# Altium PCB PCB.PcbDoc (part 2 of 3)
Units mm, origin at the board's own origin, x right, y up, seen from the top; angles counter-clockwise.
Board outline 140.5 x 50 mm, 2 copper layers (Top Layer, Bottom Layer), stack 1.69 mm thick; 213 components, 150 nets, 1171 pads, 592 vias.
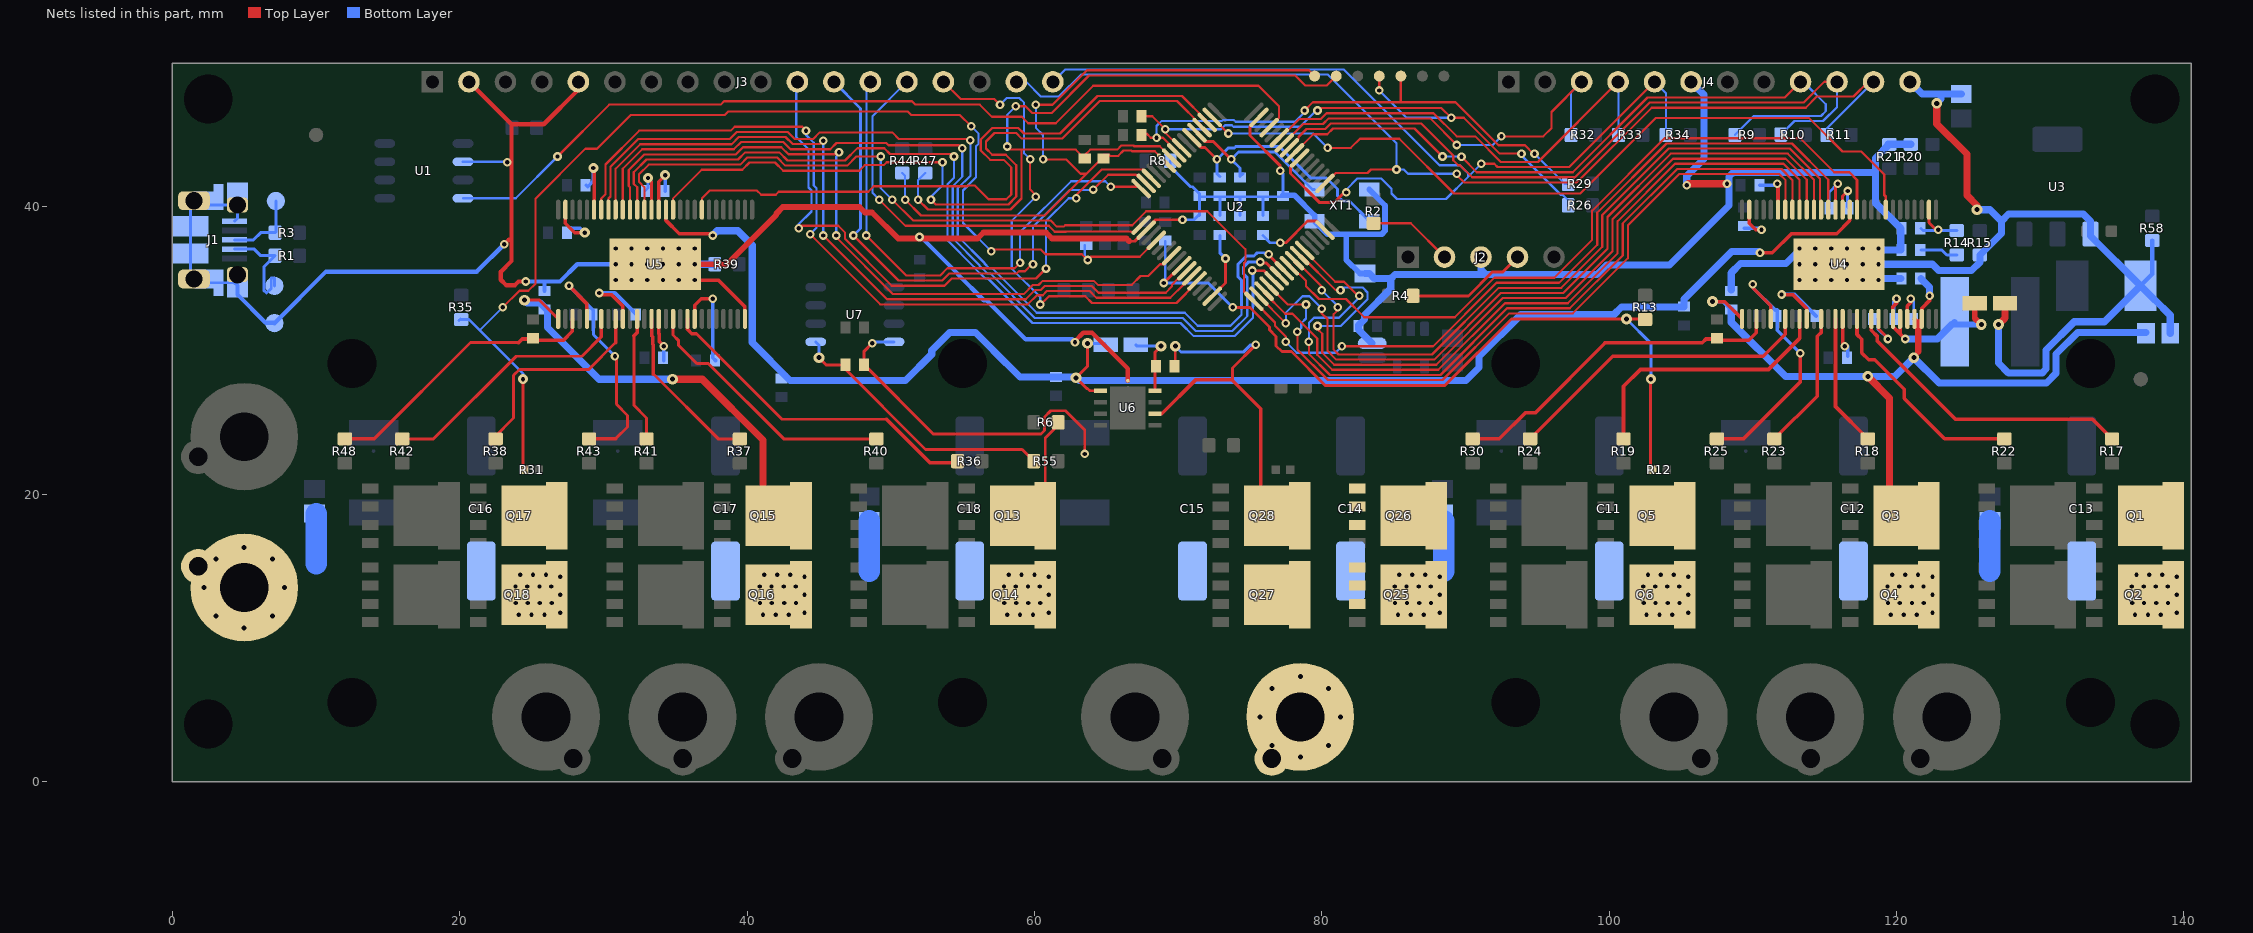
[diagram p2: the nets of this part, all layers, seen from the top]

## Via types
v1: diameter 0.6, hole 0.3, Top Layer to Bottom Layer, tented both sides, 192 vias
v2: diameter 0.7, hole 0.3, Top Layer to Bottom Layer, 154 vias
v3: diameter 0.8, hole 0.3, Top Layer to Bottom Layer, 119 vias
v4: diameter 0.7, hole 0.35, Top Layer to Bottom Layer, 80 vias
v5: diameter 0.75, hole 0.35, Top Layer to Bottom Layer, tented both sides, 37 vias
v6: diameter 0.7, hole 0.3, Top Layer to Bottom Layer, tented both sides, 9 vias
v7: diameter 0.7, hole 0.35, Top Layer to Bottom Layer, tented both sides, 1 vias

## Nets (pads, with @x,y where several pads share a name; then routed paths per layer and width w, separated by ;. In a path a pad name is that pad's centre, name@x,y a point inside that pad or via, vN(x,y) a via of type N, cw(c..) or ccw(c..) an arc to the next point about the centre after c; other vN are vias at no path point) (continued)
CAN_R_1: U1.4 U2.61 | length 63.7
  Top Layer w0.152: v1(26.8,43.5) 30.411,47.111 38.16,47.111 38.395,47.345 51.482,47.345 51.716,47.111 56.189,47.111 57.035,46.265 59.11,46.265 59.566,45.81 61.48,45.81 64.096,48.426 75.593,48.426 77.021,46.998 77.021,46.26 77.026,46.255 77.026,46.208 U2.61@76.333,45.515
  Bottom Layer w0.152: U1.4@20.225,40.595 23.895,40.595 v1(26.8,43.5)
DCBUS: C11.1 C12.1 C13.1 C14.1 C15.1 C16.1 C17.1 C18.1 C25.1 C26.2 C40.2 C41.1 C44.2 C55.2 C56.1 C60.2 J7.1 J9.2 Q1.D Q2.D Q3.D Q4.D Q5.D Q6.D Q13.D Q14.D Q15.D Q16.D Q17.D Q18.D Q25.D Q26.D R6.2 U4.29 U4.53 U4.54 U5.29 | length 107.8
  Top Layer w0.203: v5(24.5,33.5) 25.55,33.5 U5.29@26.85,32.2 ; Q13.D@60.75,18.5 60.75,23.911 61.65,24.811 R6.2@61.65,25
  Top Layer w0.25: v5(107.2,33.4) 108.05,33.4 U4.29@109.25,32.2 ; v5(121.2,29.5) v5@121.25,29.55 ; U4.53@121.25,32.2 121.4,32.05 121.4,29.7 121.6,29.9 121.6,32.05 U4.54@121.75,32.2 121.772,32.2 121.772,32.948 122.3,33.476
  Top Layer w0.5: v5(34.8,28) 36.875,28 41.1,23.775 Q15.D@41.1,18.5 ; v5(118,28.2) 119.5,26.7 Q3.D@119.5,18.5
  Bottom Layer w0.25: v5(107.2,33.4) 107.9,33.4 C41.1@108.5,32.8
  Bottom Layer w0.5: v5(24.5,33.5) 24.703,33.297 25.603,33.297 26.1,32.8 26.1,31.6 29.7,28 v5(34.8,28) ; C41.1@108.5,32.8 108.5,31.964 112.264,28.2 v5(118,28.2) 119.9,28.2 v5(121.2,29.5) 122.966,27.734 130.429,27.734 131.106,28.411 131.106,29.751 132.608,31.253 C60.2@137.35,31.253 ; C25.1@121.7,35 122.3,34.4 v1(122.3,33.8)
  Bottom Layer w1.5: 10,15.15 C55.2@10,18.65 ; 48.5,14.65 C44.2@48.5,18.15 ; 88.5,14.65 C26.2@88.5,18.15 ; 126.5,14.65 C40.2@126.5,18.15
  other v3: 24.1,11.6 25,11.6 25.9,11.6 41.1,11.6 42,11.6 42.9,11.6 58.1,11.6 59,11.6 59.9,11.6 85.3,11.6 86.2,11.6 87.1,11.6 102.6,11.6 103.5,11.6 104.4,11.6 119.6,11.6 120.5,11.6 121.4,11.6 136.6,11.6 137.5,11.6 138.4,11.6 27,11.75 44,11.75 61,11.75 88.2,11.75 105.5,11.75 122.5,11.75 139.5,11.75 23.9,12.425 24.725,12.425 25.575,12.425 26.4,12.425 40.9,12.425 41.725,12.425 42.575,12.425 43.4,12.425 57.9,12.425 58.725,12.425 59.575,12.425 60.4,12.425 85.1,12.425 85.925,12.425 86.775,12.425 87.6,12.425 102.4,12.425 103.225,12.425 104.075,12.425 104.9,12.425 119.4,12.425 120.225,12.425 121.075,12.425 121.9,12.425 136.4,12.425 137.225,12.425 138.075,12.425 138.9,12.425 27,13 44,13 61,13 88.2,13 105.5,13 122.5,13 139.5,13 23.875,13.575 24.7,13.575 25.55,13.575 26.375,13.575 40.875,13.575 41.7,13.575 42.55,13.575 43.375,13.575 57.875,13.575 58.7,13.575 59.55,13.575 60.375,13.575 85.075,13.575 85.9,13.575 86.75,13.575 87.575,13.575 102.375,13.575 103.2,13.575 104.05,13.575 104.875,13.575 119.375,13.575 120.2,13.575 121.05,13.575 121.875,13.575 136.375,13.575 137.2,13.575 138.05,13.575 138.875,13.575 27,14.25 44,14.25 61,14.25 88.2,14.25 105.5,14.25 122.5,14.25 139.5,14.25 24.2,14.4 25.1,14.4 26,14.4 41.2,14.4 42.1,14.4 43,14.4 58.2,14.4 59.1,14.4 60,14.4 85.4,14.4 86.3,14.4 87.2,14.4 102.7,14.4 103.6,14.4 104.5,14.4 119.7,14.4 120.6,14.4 121.5,14.4 136.7,14.4 137.6,14.4 138.5,14.4
  other v4: 5,10.7 3.02,11.52 6.98,11.52 2.2,13.5 7.8,13.5 3.02,15.48 6.98,15.48 5,16.3
EN_GATE_1: U2.33 U4.16 U5.16 | length 106.9
  Top Layer w0.152: U5.16@32.85,39.8 32.85,41.36 32.471,41.739 32.471,42.261 33.145,42.935 39.513,42.935 40.013,43.435 42.09,43.435 42.659,42.865 46.965,42.865 47.6,43.5 v1(49.3,43.5) ; v1(50.1,40.5) 51.559,39.041 61.14,39.041 61.56,38.621 62.04,38.621 62.14,38.721 66.81,38.721 67.776,39.687 72.032,39.687 74.679,37.04 74.679,36.179 74.585,36.085 74.585,34.111 U2.33@75.273,33.424 75.276,33.424 76.746,31.954 76.746,31.729 77.5,30.975 v1(77.5,30.6) ; v1(81.4,30.3) 87.746,30.3 92.159,34.713 96.516,34.713 99.168,37.365 99.168,39.583 103.996,44.412 112.723,44.412 115.25,41.885 U4.16@115.25,39.8
  Bottom Layer w0.152: v1(49.3,43.5) 49.3,41.3 v1(50.1,40.5) ; v1(77.5,30.6) 78.254,29.846 80.946,29.846 v1(81.4,30.3)
GH_A_2: R17.2 U4.47 | length 20.9
  Top Layer w0.25: U4.47@118.25,32.2 118.25,31.4 118.672,30.978 118.672,30.64 124.098,25.214 133.636,25.214 R17.2@135,23.85
GH_A_3: R36.1 U5.47 | length 23.6
  Top Layer w0.203: 36.464,31.172 42.422,25.214 49.704,25.214
  Top Layer w0.25: U5.47@35.85,32.2 35.85,31.474 36.152,31.172 36.464,31.172 ; 49.704,25.214 52.743,22.175 R36.1@54.825,22.175
GH_B_2: R18.2 U4.42 | length 9.3
  Top Layer w0.25: U4.42@115.75,32.2 115.75,26.1 R18.2@118,23.85
GH_B_3: R37.1 U5.42 | length 11.8
  Top Layer w0.203: 33.478,28.361 37.989,23.85 R37.1@39.5,23.85
  Top Layer w0.25: U5.42@33.35,32.2 33.35,31.038 33.428,30.96 33.428,30.44 33.424,30.436 33.478,30.381 33.478,28.361
GH_C_2: R19.2 U4.37 | length 18.6
  Top Layer w0.25: R19.2@101,23.85 101,27.5 102.178,28.678 111.089,28.678 113.25,30.839 U4.37@113.25,32.2
GH_C_3: R38.1 U5.37 | length 14.7
  Top Layer w0.203: R38.1@22.5,23.85 22.4,23.95 23.745,25.295 23.745,28.271 24.152,28.678 28.978,28.678 30.85,30.55
  Top Layer w0.25: 30.85,30.55 U5.37@30.85,32.2
GL_A_2: R22.2 U4.45 | length 15.3
  Top Layer w0.25: U4.45@117.25,32.2 117.25,31.118 117.581,30.787 117.581,29.831 118.056,29.356 118.479,29.356 120.531,27.304 120.531,26.663 123.344,23.85 R22.2@127.5,23.85
GL_A_3: R40.1 U5.45 | length 18.5
  Top Layer w0.203: U5.45@34.85,32.2 34.85,31.08 35.211,30.719 35.211,30.389 36.5,29.1 37.3,29.1 42.55,23.85 R40.1@49,23.85
GL_B_2: R23.2 U4.40 | length 9.7
  Top Layer w0.25: R23.2@111.5,23.85 114.472,26.822 114.472,30.972 114.522,31.022 114.75,31.25 U4.40@114.75,32.2
GL_B_3: R41.1 U5.40 | length 8.8
  Top Layer w0.203: 32.122,31.022 32.122,26.188 33,25.31 R41.1@33,23.85
  Top Layer w0.25: 32.122,31.022 32.35,31.25 U5.40@32.35,32.2
GL_C_2: R24.2 U4.35 | length 21.8
  Top Layer w0.25: R24.2@94.5,23.85 100.25,29.6 110.73,29.6 112.25,31.12 U4.35@112.25,32.2
GL_C_3: R42.1 U5.35 | length 18
  Top Layer w0.203: R42.1@16,23.85 18.175,23.85 23.925,29.6 28.5,29.6 29.85,30.95
  Top Layer w0.25: 29.85,30.95 U5.35@29.85,32.2
GND: C2.2 C3.2 C4.1 C5.1 C6.1 C7.2 C8.2 C9.2 C10.2 C19.1 C20.1 C24.2 C25.2 C27.2 C29.2 C41.2 C56.2 C60.1 C65.1 D1.A J1.5 J1.SH J2.3 J3.2 J3.5 J4.6 J4.12 NT1.1 NT7.1 R8.1 R15.2 R20.2 R21.2 R39.2 R58.2 TP3.1 U1.2 U2.18 U2.63 U3.1 U4.57 U5.55 U5.57 XT1.G | length 324.7
  Top Layer w0.203: 66.6,37.6 66.986,37.6 67.76,38.374 U2.18@67.777,38.374 ; U2.18@67.825,38.485 68.44,39.1 v1(70.3,39.1) ; U2.63@75.626,46.223 74.995,45.591 74.995,44.96 77.1,42.855 v1(77.1,42.5) ; v1@105.453,41.553 v1@105.5,41.6
  Top Layer w0.25: v2(36.35,36) v2(36.35,34.9) 38,34.9 39.85,33.05 U5.55@39.85,32.2
  Top Layer w0.3: J3.2@20.64,48.7 23.6,45.74 ; v1(23.1,37.4) 23.4,37.7 23.6,37.7 ; v1(24.6,34.8) 24.094,34.8 23.841,34.547 23.23,34.547 22.847,34.93 22.847,35.47 23.6,36.223 23.6,37.7 ; J3.5@28.26,48.7 28.26,48.16 25.84,45.74 23.6,45.74 ; v1@52,37.786 v1(52,37.9) ; v1(62.822,30.578) 62.822,30.651 63.398,31.228 64.002,31.228 66.5,28.73 NT7.1@66.5,27.9 ; 23.6,37.7 23.6,45.74
  Top Layer w0.4: v2(30.85,36) v2(31.95,36) v2(33.05,36) U5.57@33.6,36 v2(34.15,36) v2(35.25,36) v2(36.35,36) 38.6,36 42.022,39.422 42.022,39.522 42.478,39.978 47.822,39.978 48.2,39.6 48.7,39.6 50.514,37.786 52,37.786 56.039,37.786 56.459,38.206 60.795,38.206 61.214,37.786 62.386,37.786 62.399,37.8 66.4,37.8 66.6,37.6
  Top Layer w0.5: v1(105.4,41.5) v1@105.453,41.553 ; v1@105.5,41.6 v1(108.2,41.6) ; v5(122.8,47.2) 122.8,45.771 124.9,43.671 124.9,40.8 125.6,40.1 v5(125.6,39.8) ; v5(127.1,31.8) 127.55,32.25 D1.A@127.55,33.3
  Bottom Layer w0.203: J1.5@4.325,39 4.525,39.2 J1.SH@4.525,40.125 1.8,40.125 J1.SH@1.5,40.425 1.25,40.175 J1.SH@1.25,38.65 J1.SH@1.25,36.75 1.25,35.225 J1.SH@1.5,34.975 1.762,34.713 J1.SH@3.2,34.713 4.312,34.713 J1.SH@4.525,34.5 ; U1.2@20.225,43.135 23.265,43.135 v1(23.3,43.1) ; R8.1@69.45,43.2 69.45,42.805 70.859,41.396 71.004,41.396 71.5,40.9 C6.1@71.5,40.7 ; v1(70.3,39.1) 71.1,39.1 C8.2@71.5,39.5 ; C8.2@71.5,39.4 C8.2@71.5,39.5 ; C5.1@72.9,39.4 C2.2@72.9,40.7 ; C9.2@74.3,39.4 C3.2@74.3,40.7 ; C4.1@75.9,39.4 C7.2@75.9,40.7 ; v1@77.3,42.3 77.3,40.8 77.2,40.7 C7.2@75.9,40.7 ; C8.2@71.5,39.5 C6.1@71.5,40.7 ; C6.1@71.5,40.7 C2.2@72.9,40.7 ; C2.2@72.9,40.7 C3.2@74.3,40.7 ; C3.2@74.3,40.7 C7.2@75.9,40.7
  Bottom Layer w0.3: J1.SH@4.525,34.5 4.525,33.89 6.49,31.925 TP3.1@7.1,31.925 ; TP3.1@7.1,31.9 10.688,35.488 21.188,35.488 v1(23.1,37.4) ; v1(24.6,34.8) 25.9,34.8 ; C56.2@25.9,34.15 25.9,34.8 ; v2(30.85,36) 28.176,36 26.977,34.8 25.9,34.8 ; v1(52,37.9) 52.1,37.8 52.2,37.8 54.672,35.328 54.672,35.294 56.466,33.5 56.666,33.5 59.394,30.772 62.628,30.772 v1(62.822,30.578) ; C29.2@136.975,34.5 137.8,35.325 R58.2@137.8,37.65
  Bottom Layer w0.4: C10.2@77.3,40.8 78.1,40.8 79.5,39.4 XT1.G@79.5,39 80.403,38.097 81.7,38.097 ; C20.1@83,35.35 82.65,35.35 81.703,36.297 81.703,38.094 81.7,38.097 ; XT1.G@83.3,41.2 84.403,40.097 84.403,38.333 84.167,38.097 81.7,38.097
  Bottom Layer w0.5: v2(36.35,36) R39.2@37.75,36 ; C20.1@83,35.35 83.315,35.35 83.665,35 84.8,35 ; NT1.1@83.5,30.5 82.55,31.45 C65.1@82.55,31.7 82.55,31.75 82.963,32.163 82.963,32.463 84.8,34.3 84.8,35 ; J2.3@91.08,36.5 91.08,35.62 91.403,35.297 ; v1(105.4,41.5) 105.4,42.148 106.597,43.345 106.597,47.803 J4.6@105.7,48.7 ; v1(108.2,41.6) 108.247,41.6 v1@108.347,41.7 ; C41.2@108.5,34.2 108.5,35.404 109.143,36.047 112.311,36.047 113.364,37.1 v2(115.45,37.1) ; 118.547,42.4 118.544,42.397 108.631,42.397 108.347,42.113 v1@108.347,41.7 ; v2(118.75,34.9) v2(118.75,36) ; v2(118.75,37.1) v2(118.75,36) ; v2@118.85,35 C25.2@120.3,35 ; v2@118.85,37 120.3,37 120.3,38.5 118.547,40.253 118.547,43.397 R21.2@119.5,44.35 ; R21.2@119.415,44.35 R20.2@121,44.35 ; J4.12@120.94,48.7 121.79,47.85 123.1,47.85 ; v5(122.8,47.2) 123.1,47.5 123.1,47.85 ; C19.1@124.5,47.85 123.1,47.85 ; v5(125.6,39.8) 126.5,39.8 127.3,39 ; v5(127.1,31.8) 127.1,29.119 127.782,28.437 130.138,28.437 130.403,28.702 130.403,30.042 132.364,32.003 134.478,32.003 C29.2@136.975,34.5 ; C60.1@139.05,31.2 139.05,32.45 137.95,33.55 137.95,33.525 C29.2@136.975,34.5 ; 84.8,35 85.097,35.297 91.403,35.297 ; 91.403,35.297 99.149,35.297 99.805,35.953 104.206,35.953 108.347,40.094 v1@108.347,41.7 ; v2(118.75,36) 122.506,36 122.943,35.563 125.218,35.563 125.8,36.145 R15.2@125.8,36.65 127.3,38.15 127.3,39 ; 127.3,39 127.8,39.5 133,39.5 133.5,39 U3.1@133.5,38.1 133.5,37.975 C29.2@136.975,34.5
  other v2: 30.85,34.9 31.95,34.9 33.05,34.9 34.15,34.9 35.25,34.9 113.25,34.9 114.35,34.9 115.45,34.9 116.55,34.9 117.65,34.9 113.25,36 114.35,36 115.45,36 116.55,36 117.65,36 30.85,37.1 31.95,37.1 33.05,37.1 34.15,37.1 35.25,37.1 36.35,37.1 113.25,37.1 114.35,37.1 116.55,37.1 117.65,37.1
GPIO_1_1: J3.11 U2.14 | length 43.4
  Top Layer w0.152: v1(43.6,38.5) 43.779,38.679 46.34,38.679 46.821,38.198 46.821,37.76 50.071,34.51 53.734,34.51 54.234,35.01 60.11,35.01 v1(60.8,35.7) ; v1(62.9,40.6) 62.9,40.819 64.669,42.588 67.623,42.588 68.031,42.18 68.031,41.98 U2.14@68.131,41.98
  Bottom Layer w0.152: J3.11@43.5,48.7 43.421,48.621 43.421,44.86 44.279,44.002 44.279,41.34 44.479,41.14 44.479,39.679 43.6,38.8 v1(43.6,38.5) ; v1(60.8,35.7) 60.8,39.019 62.381,40.6 v1(62.9,40.6)
GPIO_2_1: J3.12 U2.15 | length 38.4
  Top Layer w0.152: v1(47.4,38) 50.534,34.865 53.587,34.865 54.087,35.365 58.768,35.365 58.923,35.521 59.34,35.521 59.819,36 v1(59.9,36) ; v1(64.1,41.2) 65.132,42.232 67.071,42.232 67.173,42.13 67.173,42.187 67.217,42.23 67.273,42.23 67.777,41.726 U2.15@67.777,41.626
  Bottom Layer w0.152: v1(59.9,36) 59.9,38.621 62.458,41.179 64.079,41.179 v1(64.1,41.2)
  Bottom Layer w0.203: J3.12@46.04,48.7 47.9,46.84 47.9,38.5 v1(47.4,38)
GPIO_3_1: J3.13 U2.16 | length 35.3
  Top Layer w0.152: v1(48.3,38) 51.079,35.221 53.44,35.221 53.94,35.721 58.621,35.721 v1(59,36.1) ; v1(65.3,41.4) 67.297,41.4 U2.16@67.424,41.273
  Bottom Layer w0.152: v1(48.3,38) 48.3,48.42 J3.13@48.58,48.7 ; v1(59,36.1) 59,38.023 59,38.223 62.556,41.779 64.921,41.779 v1(65.3,41.4)
GPIO_4_1: J3.14 U2.17 | length 28.8
  Top Layer w0.152: v1(49.2,40.5) 51.015,38.685 60.993,38.685 61.413,38.265 62.187,38.265 62.201,38.279 66.707,38.279 66.731,38.255 67.051,38.255 67.366,38.569 67.366,38.669 U2.17@67.424,38.727
  Bottom Layer w0.152: v1(49.2,40.5) 48.721,40.979 48.721,46.301 J3.14@51.12,48.7
GPIO_5_1: J3.15 U2.28 | length 34.6
  Top Layer w0.152: J3.15@53.66,48.7 54.86,47.5 57.2,47.5 v1(57.6,47.1) ; v1(59.7,43.3) 59.7,41.2 60.1,40.8 v1(60.1,40.7) ; v1(60.4,33.2) 60.432,33.2 61.011,33.779 63.54,33.779 64.009,33.31 69.885,33.31 71.213,34.638 71.213,34.838 U2.28@71.313,34.838
  Bottom Layer w0.152: v1(57.6,47.1) 58.079,47.579 58.94,47.579 59.279,47.24 59.279,43.721 v1(59.7,43.3) ; v1(60.1,40.7) 58.421,39.021 58.421,35.698 60.4,33.719 v1(60.4,33.2)
GVDD: C32.2 C47.2 C61.2 D2.A U4.13 U5.13 U6.1 | length 107.2
  Top Layer w0.203: v5(63.7,30.5) 63.7,28.9 v5(62.9,28.1) 63.639,27.361 63.7,27.361 63.861,27.2 U6.1@64.605,27.2
  Top Layer w0.25: U5.13@34.35,39.8 34.35,39.05 35.267,38.133 37.467,38.133 v1(37.6,38) ; v1(110.5,36.8) 111.356,36.8 112.689,38.133 115.833,38.133 116.75,39.05 U4.13@116.75,39.8
  Bottom Layer w0.203: v5(63.7,30.5) 64.85,30.5 D2.A@64.95,30.4
  Bottom Layer w0.5: v1(37.6,38) 37.928,38.328 39.343,38.328 40.353,37.318 40.353,30.553 42.995,27.911 51.019,27.911 52.847,29.739 52.847,29.992 54.108,31.253 55.892,31.253 57.153,29.992 57.153,29.982 58.985,28.15 C61.2@61.5,28.15 62.85,28.15 v5(62.9,28.1) 63.089,27.911 90.039,27.911 90.947,28.819 90.947,29.592 93.84,32.485 100.314,32.485 100.857,33.028 105.178,33.028 C32.2@105.2,33.05 105.2,33.565 108.529,36.894 110.406,36.894 v1(110.5,36.8)
M0_AH_1: U2.41 U4.17 | length 52
  Top Layer w0.152: U2.41@78.101,36.252 78.101,36.152 78.277,35.977 78.477,35.977 80,34.454 v1(80,34.2) ; v1(81.1,33) 81.1,32.8 80.821,32.521 80.821,30.06 81.16,29.721 87.669,29.721 92.306,34.358 96.663,34.358 99.523,37.218 99.523,39.436 104.143,44.056 112.576,44.056 114.679,41.953 114.679,39.8 U4.17@114.75,39.8
  Bottom Layer w0.152: v1(80,34.2) 81.1,33.1 v1(81.1,33)
M0_AL_1: U2.34 U4.18 | length 54
  Top Layer w0.152: U2.34@75.626,33.777 77.5,31.904 v1(77.5,31.9) ; v1(80,32.9) 80,32.578 80.39,32.188 80.39,29.988 81.013,29.365 87.817,29.365 92.453,34.002 96.81,34.002 99.878,37.071 99.878,39.289 104.29,43.701 112.429,43.701 114.25,41.88 U4.18@114.25,39.8
  Bottom Layer w0.152: v1(77.5,31.9) 77.5,32.619 78.66,33.779 79.14,33.779 80,32.919 v1(80,32.9)
M0_BH_1: U2.42 U4.19 | length 56.7
  Top Layer w0.152: U2.42@78.455,36.606 78.555,36.606 80.961,34.2 v1(81.3,34.2) ; v1(79.7,31.7) 79.7,31.501 80.034,31.166 80.034,29.841 80.866,29.01 87.964,29.01 92.601,33.647 96.97,33.647 100.234,36.91 100.234,39.142 104.437,43.345 112.282,43.345 113.75,41.877 U4.19@113.75,39.8
  Bottom Layer w0.152: v1(79.7,31.7) 81.318,31.7 83.179,33.56 83.179,34.04 82.84,34.379 81.479,34.379 v1(81.3,34.2)
M0_BL_1: U2.35 U4.20 | length 50
  Top Layer w0.152: U2.35@75.98,34.131 75.98,34.031 77.457,32.554 77.965,32.554 79.679,30.84 79.679,29.694 80.718,28.655 88.111,28.655 92.748,33.291 97.118,33.291 100.589,36.763 100.589,38.994 104.585,42.99 112.134,42.99 113.25,41.874 U4.20@113.25,39.8
M0_CH_1: U2.43 U4.21 | length 55.5
  Top Layer w0.152: U2.43@78.808,36.959 78.808,36.898 80.927,34.779 81.54,34.779 82.519,33.8 v1(82.6,33.8) ; v1(79.1,30.6) 79.1,29.771 80.571,28.299 88.258,28.299 92.895,32.936 97.265,32.936 100.945,36.616 100.945,38.847 104.732,42.635 111.987,42.635 112.75,41.872 U4.21@112.75,39.8
  Bottom Layer w0.152: v1(79.1,30.6) 79.1,31.919 79.46,32.279 81.198,32.279 82.6,33.681 v1(82.6,33.8)
M0_CL_1: U2.36 U4.22 | length 50.8
  Top Layer w0.152: U2.36@76.333,34.485 76.343,34.485 77.628,33.2 v1(78.9,33.2) ; v1(78.3,31.3) 78.3,30.068 80.424,27.944 88.405,27.944 93.042,32.581 97.462,32.581 101.3,36.419 101.3,38.7 104.879,42.279 111.84,42.279 112.279,41.84 112.279,39.829 U4.22@112.25,39.8
  Bottom Layer w0.152: v1(78.3,31.3) 78.565,31.565 78.565,31.887 78.9,32.222 v1(78.9,33.2)
M0_DC_CAL_1: U2.40 U4.12 | length 50.8
  Top Layer w0.152: U2.40@77.748,35.899 77.848,35.899 78.9,34.847 78.9,34.481 79.802,33.579 81.686,33.579 82.946,32.319 89.263,32.319 92.012,35.068 96.184,35.068 98.812,37.697 98.812,39.73 103.849,44.767 113.301,44.767 115.668,42.4 116.726,42.4 117.255,41.871
  Top Layer w0.203: U4.12@117.25,39.8 117.25,40.824 117.255,40.829 117.255,41.871
M0_ENC_A_1: J4.9 R9.1 U2.56 | length 49.7
  Top Layer w0.152: v1(88.4,43.5) 86.455,45.445 80.772,45.445 80.382,45.055 79.408,45.055 U2.56@78.295,43.941 ; v1(89.725,43.475) 90.79,42.41 97.471,42.41 102.671,47.61 112.23,47.61 J4.9@113.32,48.7 ; U2.56@78.295,43.941 78.295,44.005 78.101,43.812 U2.56@78.101,43.748 U2.56@78.295,43.941
  Bottom Layer w0.152: v1(88.4,43.5) 89.7,43.5 v1(89.725,43.475) ; R9.1@108.75,45 110.071,46.321 114.74,46.321 115.079,46.66 115.079,47.14 J4.9@113.668,48.551
M0_ENC_B_1: J4.10 R10.1 U2.57 | length 49.9
  Top Layer w0.152: U2.57@77.748,44.101 78.381,44.734 78.381,44.857 78.934,45.41 80.234,45.41 80.625,45.801 86.918,45.801 89.146,43.573 89.146,43.235 89.485,42.895 89.623,42.895 90.464,42.055 97.618,42.055 102.818,47.255 113.533,47.255 114.978,48.7 J4.10@115.86,48.7
  Bottom Layer w0.152: R10.1@111.95,45.022 112.893,45.965 114.887,45.965 115.86,46.938 J4.10@115.86,48.7
M0_ENC_Z_1: J3.17 J4.11 R11.1 U2.50 | length 78.3
  Top Layer w0.152: U2.50@80.223,41.626 80.236,41.626 80.965,42.355 83.179,42.355 83.424,42.6 v1(85.2,42.6) ; v1(89.4,42.3) 89.4,42.2 89.901,41.699 97.765,41.699 102.965,46.899 113.68,46.899 114.452,47.671 117,47.671 118.029,48.7 J4.11@118.4,48.7
  Bottom Layer w0.152: J3.17@58.74,48.7 59.419,48.7 60.448,47.671 61.706,47.671 63.234,49.199 79.244,49.199 80.426,49.199 85.2,44.425 v1(85.2,42.6) 85.7,42.6 86,42.3 v1(89.4,42.3) ; R11.1@115.15,45 115.15,45.45 J4.11@118.4,48.7
M0_NCS_1: U2.2 U4.8 | length 55.8
  Top Layer w0.152: U2.2@72.374,46.223 73.496,45.1 v1(73.5,45.1) ; v1(80.4,44.1) 82.019,44.1 82.654,44.735 85.392,44.735 89.203,40.924 97.995,40.924 103.26,46.189 113.89,46.189 116.234,43.845 117.543,43.845 119.145,42.242 119.145,41.371
  Top Layer w0.203: 119.145,41.371 119.145,40.829 119.25,40.724 U4.8@119.25,39.8
  Bottom Layer w0.152: v1(73.5,45.1) 79.4,45.1 v1(80.4,44.1)
M0_SO1_1: C38.1 R26.2 TP6.1 U2.8 | length 42.4
  Top Layer w0.152: C38.1@67.5,46.3 68.2,46.3 v1(69.1,45.4) 69.1,45.154 70.152,44.101 U2.8@70.252,44.101 ; v1(79.7,46.7) 79.867,46.867 88.333,46.867 v1(89,46.2) 89.878,46.2 92.378,43.7 v1(93.9,43.7) ; v1(84,48.1) TP6.1@84,49.1
  Bottom Layer w0.152: v1(69.1,45.4) 72.981,45.4 73.26,45.679 73.74,45.679 73.853,45.566 78.485,45.566 79.619,46.7 v1(79.7,46.7) ; v1(84,48.1) 85.9,46.2 v1(89,46.2) ; v1(93.9,43.7) 93.9,43.571 96.65,40.821 96.779,40.821 97.15,40.45 R26.2@97.15,40.1
M0_SO2_1: C39.1 R29.2 TP7.1 U2.9 | length 37.9
  Top Layer w0.152: C39.1@67.3,45 67.5,44.8 67.8,45.1 68.1,44.8 v1(68.5,44.8) 68.947,44.8 69.899,43.848 U2.9@69.899,43.748 ; v1(78.8,46.7) 79.379,47.279 85.5,47.279 ; TP7.1@85.5,49.1 85.5,47.279 ; v1(94.8,43.7) 94.719,43.7 94.14,44.279 92.301,44.279 89.301,47.279 85.5,47.279
  Bottom Layer w0.152: v1(68.5,44.8) 68.5,45.619 68.86,45.979 73.058,45.979 73.113,46.034 73.887,46.034 74,45.921 78.14,45.921 78.8,46.581 v1(78.8,46.7) ; v1(94.8,43.7) 96.9,41.6 R29.2@97.15,41.6
M0_TEMP_1: C23.2 R12.1 R13.1 U2.25 | length 54.5
  Top Layer w0.203: v1(69,34.7) 70.199,35.899 U2.25@70.252,35.899 ; v1(73.8,33) 75.004,33 76.365,31.638 76.365,31.438 76.821,30.983 76.821,30.881 76.82,30.319 77.219,29.92 77.883,29.92 80.24,27.563 88.563,27.563 93.2,32.2 v5(101.2,32.2) 102.45,32.2 R13.1@102.5,32.15 ; R12.1@102.875,22 102.875,27.975 v6(102.9,28)
  Bottom Layer w0.203: C23.2@69.1,37.6 69.1,34.8 v1(69,34.7) 72.1,34.7 v1(73.8,33) ; v5(101.2,32.2) 102.9,30.5 v6(102.9,28)
M1_AH_1: U2.37 U5.17 | length 62.1
  Top Layer w0.152: U5.17@32.35,39.8 32.35,41.357 32.115,41.592 32.115,42.408 32.997,43.29 39.366,43.29 39.866,43.79 42.237,43.79 42.806,43.221 46.818,43.221 47.677,44.079 49.54,44.079 49.94,43.679 54.221,43.679 v1(54.4,43.5)
  Top Layer w0.203: v1(75.164,35.564) 75.179,35.55 75.975,35.55 U2.37@76.687,34.838
  Bottom Layer w0.152: v1(54.4,43.5) 54.4,42.025 53.956,41.581 53.956,37.655 55.811,35.8 55.811,35.766 56.566,35.011 56.766,35.011 59.866,31.911 60.766,31.911 70.166,31.911 71.077,31 73.923,31 75.217,32.294 75.217,33.05
  Bottom Layer w0.203: v1(75.164,35.564) 75.217,35.512 75.217,33.05
M1_AL_1: U2.23 U5.18 | length 50.8
  Top Layer w0.152: U5.18@31.85,39.8 31.85,41.355 31.76,41.445 31.76,42.555 32.85,43.645 39.218,43.645 39.718,44.145 42.384,44.145 42.875,43.655 46.255,43.655 v1(46.4,43.8) ; v1(46.2,38) 46.2,37.878 50.157,33.921 59.248,33.921 59.882,34.555 60.279,34.555 60.57,34.845 64.133,34.845 64.413,34.565 66.771,34.565 67.384,35.179 67.914,35.179 68.735,36 69.039,36 69.445,36.406 69.445,36.606 U2.23@69.545,36.606
  Bottom Layer w0.152: v1(46.2,38) 46.2,43.5 46.4,43.7 v1(46.4,43.8)
M1_BH_1: U2.38 U5.19 | length 64.5
  Top Layer w0.152: U5.19@31.35,39.8 31.35,42.648 32.703,44.001 39.071,44.001 39.571,44.501 42.531,44.501 43.022,44.01 45.791,44.01 46.215,44.435 49.687,44.435 49.843,44.279 54.756,44.279 v1(54.968,44.068)
  Top Layer w0.203: v1(75.71,36.155) 75.769,36.095 76.137,36.095 U2.38@77.041,35.192
  Bottom Layer w0.152: v1(54.968,44.068) 54.968,43.751 54.979,43.74 54.979,42.102 54.311,41.434 54.311,37.802 56.166,35.947 56.166,35.913 56.713,35.366 56.913,35.366 60.013,32.266 60.913,32.266 70.313,32.266 71.224,31.355 73.776,31.355 74.811,32.39 74.811,33.05
  Bottom Layer w0.203: 74.811,33.05 74.811,35.063 74.56,35.314 74.56,35.815 74.914,36.169 75.695,36.169 v1(75.71,36.155)
M1_BL_1: U2.26 U5.20 | length 53.6
  Top Layer w0.152: U5.20@30.849,39.801 30.849,42.649 32.556,44.356 38.924,44.356 39.424,44.856 42.679,44.856 43.169,44.365 45.065,44.365 v1(45.3,44.6) ; v1(45.3,38) 49.735,33.565 59.395,33.565 60.029,34.199 60.426,34.199 60.717,34.49 63.986,34.49 64.455,34.021 69.14,34.021 69.579,34.46 69.579,34.584 69.947,34.953 70.072,34.953 70.606,35.487 U2.26@70.606,35.545
  Bottom Layer w0.152: v1(45.3,38) v1(45.3,44.6)
M1_CH_1: U2.39 U5.21 | length 67.1
  Top Layer w0.152: U5.21@30.35,39.8 30.35,40.579 30.494,40.723 30.494,42.797 32.409,44.712 38.777,44.712 39.277,45.212 42.826,45.212 43.317,44.721 44.602,44.721 45.06,45.179 50.102,45.179 50.56,44.721 55.45,44.721 v1(55.536,44.636)
  Top Layer w0.203: v1@76.3,36.639 U2.39@77.394,35.545
  Bottom Layer w0.152: v1(55.536,44.636) 55.547,44.624 55.547,42.168 54.666,41.287 54.666,37.949 56.521,36.094 56.521,36.06 56.86,35.721 57.06,35.721 60.16,32.621 61.06,32.621 70.46,32.621 71.36,31.721 73.64,31.721 74.405,32.486 74.405,32.905
  Bottom Layer w0.203: 74.405,32.905 74.405,34.895 74.154,35.146 74.154,35.983 74.746,36.575 75.275,36.575 75.5,36.8 76,36.8 76.1,36.7 v1(76.3,36.7)
M1_CL_1: U2.27 U5.22 | length 56
  Top Layer w0.152: U5.22@29.85,39.8 29.85,40.581 30.138,40.87 30.138,42.944 32.494,45.3 38.863,45.3 39.13,45.567 43.833,45.567 v1(44.1,45.3) ; v1(44.4,38.1) 44.4,38.081 49.271,33.21 59.542,33.21 60.176,33.844 60.573,33.844 60.864,34.135 63.839,34.135 64.308,33.665 69.457,33.665 70.389,34.597 70.399,34.588 70.455,34.588 70.859,34.991 70.859,35.192 U2.27@70.959,35.192
  Bottom Layer w0.152: v1(44.1,45.3) 44.1,45 44.634,44.466 44.634,41.487 44.834,41.287 44.834,38.534 v1(44.4,38.1)
M1_DC_CAL_1: U2.4 U5.12 | length 53
  Top Layer w0.152: U5.12@34.85,39.8 34.85,40.587 36.842,42.579 39.66,42.579 40.16,43.079 41.943,43.079 42.512,42.51 47.8,42.51 48.19,42.9 49.519,42.9 49.719,43.1 v1(53.6,43.1) ; v1(52.8,40.5) 53.135,40.165 58.187,40.165 58.734,40.713 58.734,42.893 58.007,43.621 57.06,43.621 56.621,44.06 56.621,44.54 57.215,45.135 58.733,45.135 59.124,44.744 61.921,44.744 64.537,47.36 69.923,47.36 71.566,45.716 71.566,45.515 U2.4@71.667,45.515
  Bottom Layer w0.152: v1(52.8,40.5) 52.8,40.7 53.6,41.5 v1(53.6,43.1)
M1_ENC_A_1: J4.3 R32.2 U2.58 | length 28.7
  Top Layer w0.152: U2.58@77.394,44.455 78.705,45.765 80.087,45.765 80.478,46.156 87.544,46.156 v1(89.4,44.3) ; v1(92.5,44.9) 95.419,44.9 95.979,45.46 95.979,46.599 J4.3@98.08,48.7
  Bottom Layer w0.152: v1(89.4,44.3) 91.9,44.3 v1(92.5,44.9) ; R32.2@97.35,45 97.35,47.97 J4.3@98.08,48.7
M1_ENC_B_1: J4.4 R33.2 U2.59 | length 31.7
  Top Layer w0.152: U2.59@77.041,44.808 77.141,44.808 78.453,46.121 79.94,46.121 80.331,46.512 87.769,46.512 89.381,44.9 90.675,44.9 92.455,43.121 95.041,43.121 J4.4@100.62,48.7
  Bottom Layer w0.152: J4.4@100.62,48.7 100.65,48.67 R33.2@100.65,45
M1_ENC_Z_1: J3.18 J4.5 R34.2 U2.55 | length 69.2
  Top Layer w0.152: v1(91.097,43) 91.995,43 92.229,42.765 97.225,42.765 J4.5@103.16,48.7
  Top Layer w0.203: U2.55@78.455,43.394 77.823,42.763 77.823,42.322 79.857,40.288 80.856,40.288 81.568,41 v1(81.7,41)
  Bottom Layer w0.152: J3.18@61.28,48.7 62.134,49.554 79.096,49.554 ; 79.097,49.554 80.573,49.554 ; 80.573,49.554 81.527,49.554 88.186,42.896 89.623,42.896 90.197,42.321 90.197,42.1 ; v1(81.7,41) 81.7,41.195 82.484,41.979 84.116,41.979 84.846,41.249 84.846,40.929 85.229,40.546 88.643,40.546 90.197,42.1 ; v1(91.097,43) 90.197,42.1 ; J4.5@103.16,48.7 103.95,47.91 R34.2@103.95,45
M1_NCS_1: U2.3 U5.8 | length 46.9
  Top Layer w0.152: U5.8@36.85,39.8 36.85,40.576 37.408,41.135 40.675,41.135 40.975,40.835 41.989,40.835 42.209,41.054 48.432,41.054 48.813,41.435 55.315,41.435 55.36,41.479 55.84,41.479 56.798,40.521 58.04,40.521 58.379,40.86 58.379,42.746 57.86,43.265 56.913,43.265 56.265,43.913 56.265,44.687 57.068,45.49 58.881,45.49 59.271,45.099 61.774,45.099 64.39,47.715 70.274,47.715 71.92,46.069 71.92,45.869 U2.3@72.02,45.869
M1_SO1_1: C53.1 R44.2 TP8.1 U2.11 | length 51
  Top Layer w0.152: v1(51,40.5) 52.104,39.396 60.716,39.396 63.62,42.3 ; v1(60.1,47.1) 61.262,47.1 63.662,49.5 79.1,49.5 TP8.1@79.5,49.1 ; v1(60.6,43.3) 62.2,43.3 63.2,42.3 63.62,42.3 ; U2.11@69.192,43.041 68.367,43.865 66.79,43.865 66.74,43.915 66.196,43.915 65.825,43.545 65.273,43.545 65.193,43.624 64.8,43.624 64.8,43.48 63.62,42.3
  Bottom Layer w0.152: R44.2@50.8,42.35 51,42.15 v1(51,40.5) ; v1(60.1,47.1) 60.1,45.5 60.6,45 v1(60.6,43.3)
M1_SO2_1: C54.1 R47.2 TP9.1 U2.10 | length 53.1
  Top Layer w0.152: v1(51.9,40.5) 52.59,39.81 58.334,39.81 59.1,40.576 59.1,43.979 ; v1(58.1,44.2) 58.321,43.979 59.1,43.979 ; v1(58.7,47) 59.381,47 59.86,46.521 61.185,46.521 63.801,49.137 78.143,49.137 78.84,48.44 80.34,48.44 TP9.1@81,49.1 ; U2.10@69.545,43.394 68.719,44.221 66.937,44.221 66.887,44.271 66.049,44.271 65.757,43.979 63.879,43.979 63.5,43.6 C54.1@63.5,43.35 62.871,43.979 59.1,43.979
  Bottom Layer w0.152: v1(51.9,40.5) 51.9,41.85 R47.2@52.4,42.35 ; v1(58.1,44.2) 58.1,46.4 v1(58.7,47)
M1_TEMP_1: C43.2 R31.1 R35.1 U2.20 | length 81
  Top Layer w0.152: v1@23.019,33 v1(23,33) 24.154,34.154 24.773,34.154 25.279,34.66 25.279,39.34 25.271,39.348 25.271,40.566 28.745,44.04 29.559,44.04 31.909,46.39 38.445,46.39 38.689,46.635 51.187,46.635 51.432,46.39 54.81,46.39 v1(55.6,45.6) ; v1(57,36.9) 57.135,37.035 60.436,37.035 60.766,36.704 63.296,36.704 v1(63.7,36.3) 63.918,36.518 67.336,36.518 U2.20@68.485,37.667
  Top Layer w0.203: v6(24.4,28) 24.4,21.8 R31.1@24.5,21.7
  Bottom Layer w0.152: 21.4,31.4 v1(23,33) ; v1(55.6,45.6) 56.115,45.085 56.115,44.396 55.921,44.202 55.921,42.04 55.021,41.14 55.021,38.879 v1(57,36.9) ; C43.2@63.5,37.35 63.5,36.5 v1(63.7,36.3)
  Bottom Layer w0.203: R35.1@19.95,32.1 20.05,32.2 R35.1@20.1,32.15 20.65,32.15 21.4,31.4 24.4,28.4 v6(24.4,28)
NetC2_1: C2.1 U2.6 XT1.1 | length 17.2
  Top Layer w0.203: U2.6@70.959,44.808 71.024,44.808 71.024,44.68 71.579,44.124 71.876,44.124 v1(72.7,43.3)
  Bottom Layer w0.203: C2.1@72.9,42.1 72.7,42.3 v1(72.7,43.3) 73.49,44.09 73.919,44.09 74.04,44.21 77.026,44.21 79.232,42.005 80.326,42.005 81.095,41.235 81.095,40.75 81.45,40.395 81.935,40.395 83.3,39.031 XT1.1@83.3,39
NetC3_1: C3.1 U2.5 XT1.3 | length 12.1
  Top Layer w0.203: U2.5@71.313,45.162 71.377,45.162 71.377,45.033 71.88,44.531 72.469,44.531 v1(73.7,43.3)
  Bottom Layer w0.203: C3.1@74.5,42.3 74.3,42.1 74.3,42.7 v1(73.7,43.3) 73.703,43.3 74.208,43.804 76.747,43.804 79.352,41.2 XT1.3@79.5,41.2
NetC4_2: C4.2 U2.47 | length 5.5
  Top Layer w0.203: v1(77.1,37.5) 77.5,37.5 79.005,39.005 79.61,39.005 80.158,38.456 80.158,38.374 U2.47@80.223,38.374
  Bottom Layer w0.203: C4.2@75.9,38 76.4,37.5 v1(77.1,37.5)
NetC5_2: C5.2 U2.31 | length 4.8
  Top Layer w0.203: U2.31@72.374,33.777 73.3,34.704 v1(73.3,36.4)
  Bottom Layer w0.203: C5.2@72.9,38 72.9,36.8 v1(73.3,36.4)
NetC24_1: C24.1 R14.1 U4.2 | length 4.3
  Top Layer w0.203: U4.2@122.25,39.8 122.25,38.894 122.744,38.4 v1(122.9,38.4)
  Bottom Layer w0.203: C24.1@121.7,38.5 121.85,38.35 R14.1@124.2,38.35
NetC27_1: C27.1 R14.2 | length 2.6
  Bottom Layer w0.203: C27.1@121.7,37 123.15,37 123.5,36.65 R14.2@124.2,36.65
NetC28_1: C28.1 D1.K L2.1 U4.50 U4.51 | length 13.5
  Top Layer w0.25: v1(120,33.6) 120,33.3 119.75,33.05 119.75,31.65 120.25,31.15 ; U4.51@120.25,32.2 120.25,31.15 ; v1(120.6,30.8) 120.25,31.15
  Top Layer w0.4: D1.K@125.45,33.3 125.45,32.25 v5(125.9,31.8)
  Bottom Layer w0.25: C28.1@119.8,32.2 119.8,33.4 v1(120,33.6)
  Bottom Layer w0.4: L2.1@124.04,32 123.84,31.8 v5(125.9,31.8)
  Bottom Layer w0.5: v1(120.6,30.8) 122.84,30.8 L2.1@123.84,31.8
NetC28_2: C28.2 U4.52 | length 3
  Top Layer w0.25: U4.52@120.75,32.2 120.75,33.091 121,33.341 v1(121,33.6)
  Bottom Layer w0.203: v1(121,33.6) 121.2,33.4 C28.2@121.2,32.2
NetC30_2: C30.2 U4.48 | length 3.4
  Top Layer w0.203: U4.48@118.75,32.2 118.75,31.507 119.4,30.857 v1(119.4,30.8)
  Bottom Layer w0.203: C30.2@118.7,32.2 118.7,31.5 v1(119.4,30.8)
NetC31_2: C31.2 U4.43 | length 2.9
  Top Layer w0.203: U4.43@116.25,32.2 U4.43@116.261,32.189
  Top Layer w0.25: U4.43@116.25,32.2 116.25,30.45 v1(116.4,30.3)
  Bottom Layer w0.25: v1(116.4,30.3) 116.6,30.3 C31.2@116.6,29.6
NetC33_1: C33.1 U4.14 | length 2.7
  Top Layer w0.203: U4.14@116.25,39.8 116.25,40.75 v1(116.6,41.1)
  Bottom Layer w0.203: v1(116.6,41.1) 116.6,40 C33.1@116.7,39.9
NetC33_2: C33.2 U4.15 | length 3.8
  Top Layer w0.203: U4.15@115.75,39.8 115.75,41.45 v1(115.9,41.6)
  Bottom Layer w0.203: C33.2@115.3,39.9 115.3,41 v1(115.9,41.6)
NetC34_2: C34.2 U4.38 | length 6
  Top Layer w0.25: v1(112,33.9) 112.033,33.867 112.809,33.867 113.75,32.926 113.75,32.378 113.772,32.4 113.772,32.222 U4.38@113.75,32.2
  Bottom Layer w0.25: v1(112,33.9) 112.9,33.9 C34.2@114.4,32.4
NetC35_2: C35.2 U4.23 | length 3.1
  Top Layer w0.25: v1(111.7,41.6) 111.75,41.55 U4.23@111.75,39.8
  Bottom Layer w0.25: C35.2@110.5,41.5 111.6,41.5 v1(111.7,41.6)
NetC36_1: C36.1 R25.2 U4.33 | length 18.6
  Top Layer w0.25: R25.2@107.5,23.85 109.35,23.85 113.3,27.8 v1(113.3,29.8) ; v1(110,34.6) 110,34.371 111.25,33.121 U4.33@111.25,32.2
  Bottom Layer w0.25: v1(110,34.6) 110,34.371 111.552,32.819 111.681,32.819 111.7,32.8 111.7,32.4 111.7,31.4 v1(113.3,29.8)
NetC37_2: C37.2 U4.27 | length 3.2
  Top Layer w0.25: U4.27@109.75,39.8 109.75,38.861 110.211,38.4 v1(110.6,38.4)
  Bottom Layer w0.25: C37.2@109.4,38.5 110.5,38.5 v1(110.6,38.4)
NetC42_1: C42.1 R30.2 U4.31 | length 23.9
  Top Layer w0.25: R30.2@90.5,23.85 92.35,23.85 94.172,25.672 94.87,25.672 99.7,30.502 99.7,30.547 106.488,30.547 106.741,30.8 107.5,30.8 107.581,30.719 109.708,30.719 110.228,31.239 110.228,32.2 U4.31@110.25,32.2
NetC45_2: C45.2 U5.48 | length 6.8
  Top Layer w0.25: U5.48@36.35,32.2 36.35,33.139 36.811,33.6 v1(37.6,33.6)
  Bottom Layer w0.25: v1(37.6,33.6) 37.6,29.5 C45.2@37.8,29.3
NetC46_2: C46.2 U5.43 | length 3
  Top Layer w0.25: U5.43@33.85,32.2 33.85,31.179 33.881,31.148 33.881,30.619 v1(34.2,30.3)
  Bottom Layer w0.25: C46.2@34.2,29.3 v1(34.2,30.3)
NetC48_1: C48.1 U5.14 | length 3.7
  Top Layer w0.25: U5.14@33.85,39.8 33.85,41.75 v6(34.3,42.2)
  Bottom Layer w0.25: C48.1@34.3,41.1 v6(34.3,42.2)
NetC48_2: C48.2 U5.15 | length 3.3
  Top Layer w0.203: v6(33.1,42) 33.35,41.75 U5.15@33.35,39.8
  Bottom Layer w0.203: C48.2@32.9,41.1 33.1,41.3 v6(33.1,42)
NetC49_2: C49.2 U5.38 | length 6.3
  Top Layer w0.25: v1(29.7,34) 29.7,33.834 29.733,33.867 30.574,33.867 31.35,33.091 U5.38@31.35,32.2
  Bottom Layer w0.25: v1(29.7,34) 30.8,34 C49.2@32.3,32.5
NetC50_2: C50.2 U5.23 | length 4.5
  Top Layer w0.25: v6(29.3,42.7) 29.35,42.65 U5.23@29.35,39.8
  Bottom Layer w0.25: C50.2@28.8,41.5 28.9,41.4 29.3,41.8 v6(29.3,42.7)
NetC51_1: C51.1 R43.2 U5.33 | length 17.4
  Top Layer w0.203: v1(30.8,29.6) 30.9,29.5 30.9,26.261 31.68,25.481 31.68,24.68 30.85,23.85
  Top Layer w0.25: v1(27.6,34.5) 28.828,33.272 28.828,32.2 U5.33@28.85,32.2 ; R43.2@29,23.85 30.85,23.85
  Bottom Layer w0.203: 29.3,31.4 29.3,31.1 v1(30.8,29.6)
  Bottom Layer w0.25: v1(27.6,34.5) 29.3,32.8 29.3,31.4
NetC52_2: C52.2 U5.27 | length 3.2
  Top Layer w0.25: U5.27@27.35,39.8 27.35,38.861 28.011,38.2 v6(28.7,38.2)
  Bottom Layer w0.25: C52.2@27.8,38.5 28.4,38.5
NetC57_1: C57.1 R48.2 U5.31 | length 19.9
  Top Layer w0.203: 14.05,23.85 20.747,30.547 24.088,30.547
  Top Layer w0.25: R48.2@12,23.85 14.05,23.85 ; 24.088,30.547 24.341,30.8 25.1,30.8 25.181,30.719 27.219,30.719 27.828,31.328 27.828,32.2 U5.31@27.85,32.2
NetC59_1: C59.1 D2.K U6.8 | length 5.1
  Top Layer w0.203: U6.8@68.395,27.2 68.4,27.205 68.4,28.9 68.4,29.9 v5(68.8,30.3)
  Bottom Layer w0.203: D2.K@67.05,30.4 67.15,30.3 v5(68.8,30.3)
NetC59_2: C59.2 J21.1 J23.2 Q25.S Q26.S Q27.D Q28.D U6.6 | length 28.3
  Top Layer w0.203: C59.2@69.8,28.9 v5(69.8,30.3) ; 73.774,27.95 73.774,28.774 v1(75.4,30.4)
  Top Layer w0.25: U6.6@68.395,25.6 68.859,25.6 71.209,27.95 ; 70.587,27.328 71.209,27.95 ; 71.4,27.95 71.209,27.95 ; 73.774,27.924 75.75,25.948 Q28.D@75.75,18.5 ; 73.774,27.95 71.209,27.95
  Bottom Layer w0.203: v5(69.8,30.3) 70.2,29.9 70.66,29.9 70.676,29.884 74.535,29.884 75.051,30.4 75.151,30.3 75.251,30.4 v1(75.4,30.4)
  other v4: 78.5,1.7 76.52,2.52 80.48,2.52 75.7,4.5 81.3,4.5 76.52,6.48 80.48,6.48 78.5,7.3
NetC62_1: C62.1 R55.1 U7.1 | length 19.4
  Top Layer w0.203: v5(45,29.5) 45.5,29 C62.1@46.526,29 ; C62.1@46.8,29 C62.1@46.526,29 ; R55.1@59.95,22.3 59.145,23.105 52.421,23.105 C62.1@46.526,29
  Bottom Layer w0.203: U7.1@44.775,30.595 45,30.37 v5(45,29.5)
NetC62_2: C62.2 NT6.1 U7.8 | length 24.3
  Top Layer w0.203: v1(48.7,30.5) 48.15,29.95 C62.2@48.15,29 52.955,24.195 60.46,24.195 60.705,24.44 60.705,25.369 61.14,25.805 62.16,25.805 63.5,24.465 v1(63.5,22.8)
  Bottom Layer w0.203: v1(48.7,30.5) 48.795,30.595 U7.8@50.225,30.595 ; v1(63.5,22.8) NT6.1@63.5,23
NetJ1_2: J1.2 R1.2 TP1.1 | length 7.9
  Bottom Layer w0.203: J1.2@4.325,37.05 5.7,37.05 6.15,36.6 R1.2@7.15,36.6 6.364,35.814 6.364,34.195 6.558,34.001 6.879,34.322 6.879,35.033 7.1,35.033 TP1.1@7.1,34.5
NetJ1_3: J1.3 R3.2 TP2.1 | length 5.3
  Bottom Layer w0.203: J1.3@4.325,37.7 5.65,37.7 6.15,38.2 R3.2@7.15,38.2 7.2,38.25 TP2.1@7.2,40.4
NetJ2_2: J2.2 R2.1 | length 5.9
  Top Layer w0.152: R2.1@83.6,38.85 86.19,38.85 J2.2@88.54,36.5
NetJ2_4: J2.4 R4.1 | length 8.4
  Top Layer w0.203: R4.1@86.35,33.8 90.205,33.8 91.854,35.449 92.569,35.449 J2.4@93.62,36.5